# EAGLE board PiPSU (EAGLE 6.1)
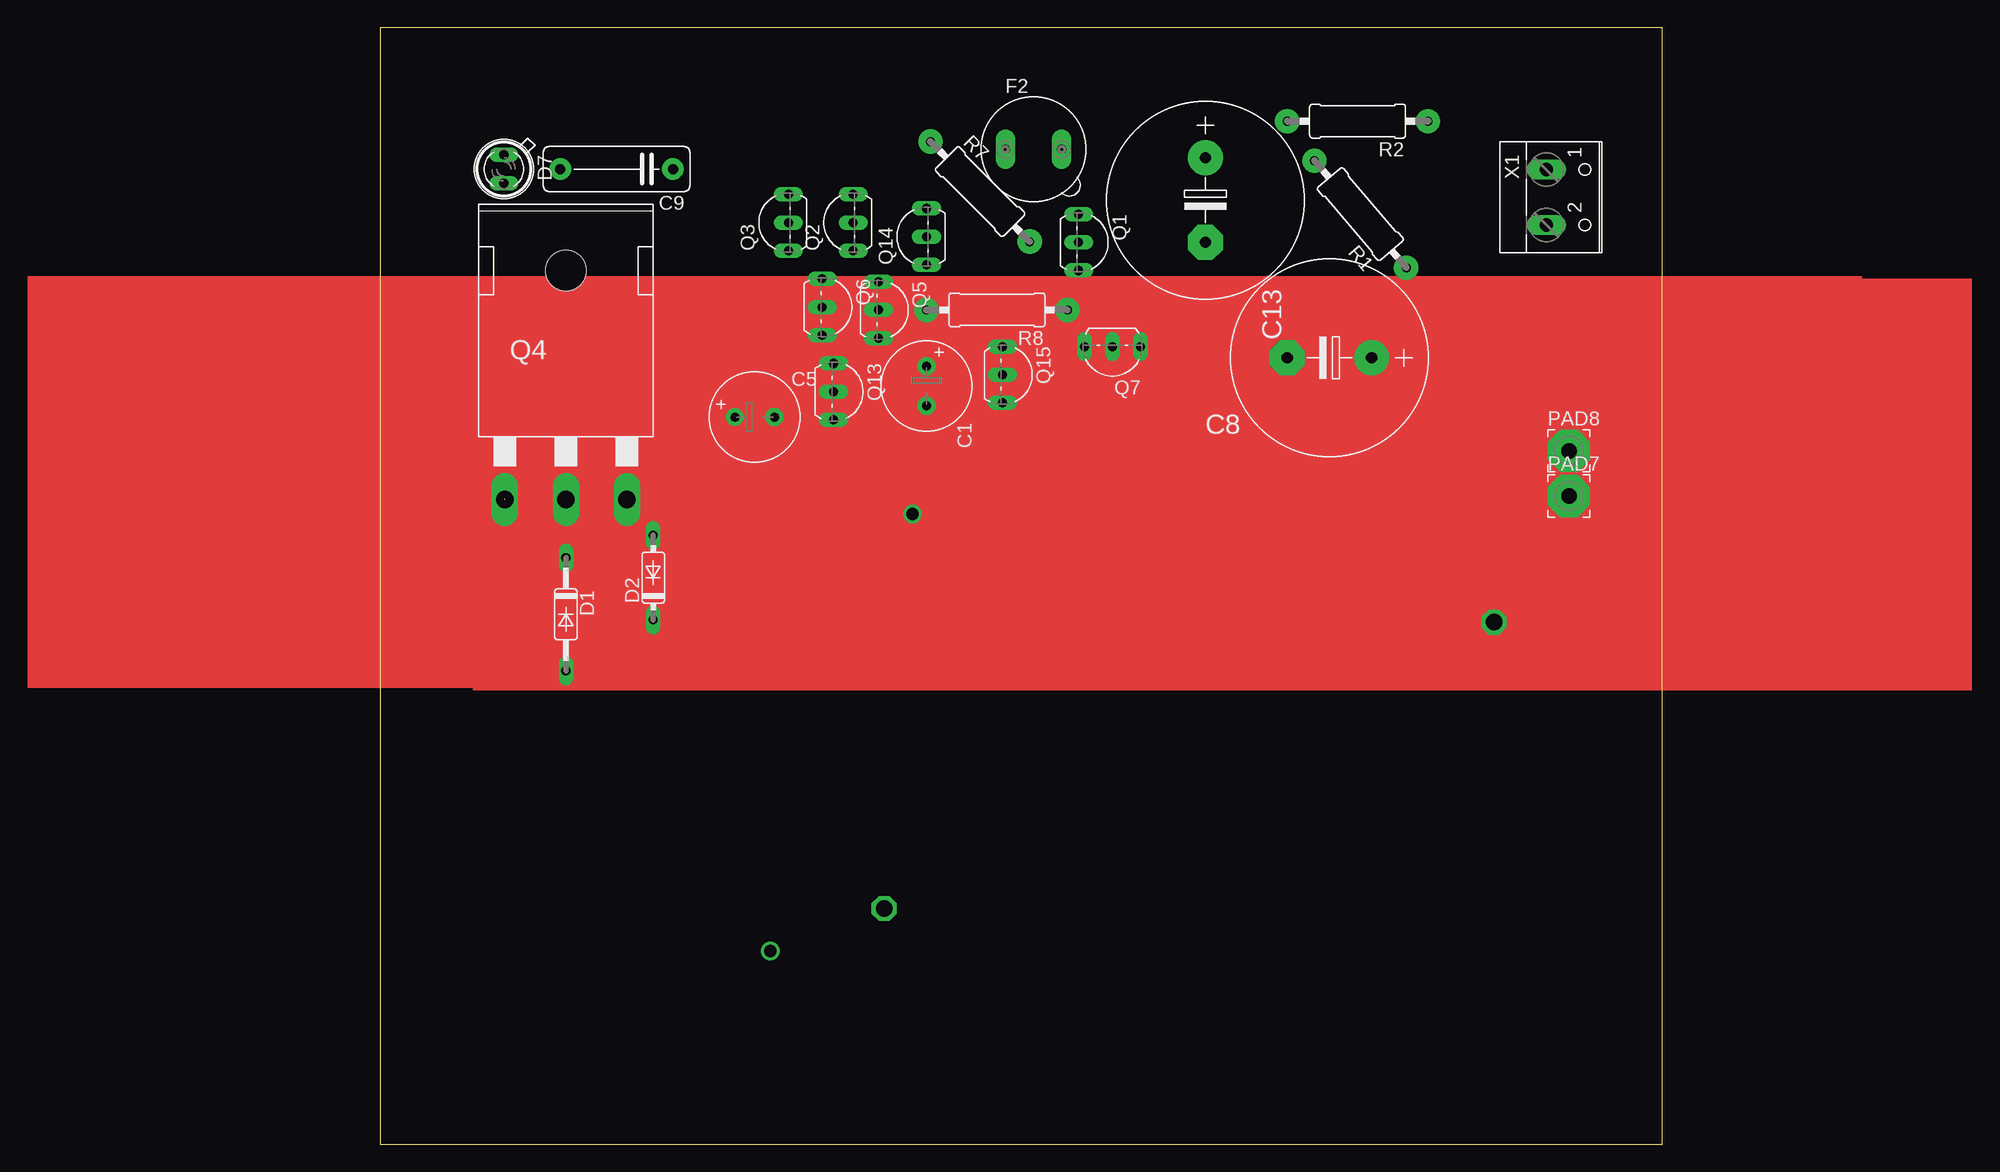
[diagram p0: board, top side]
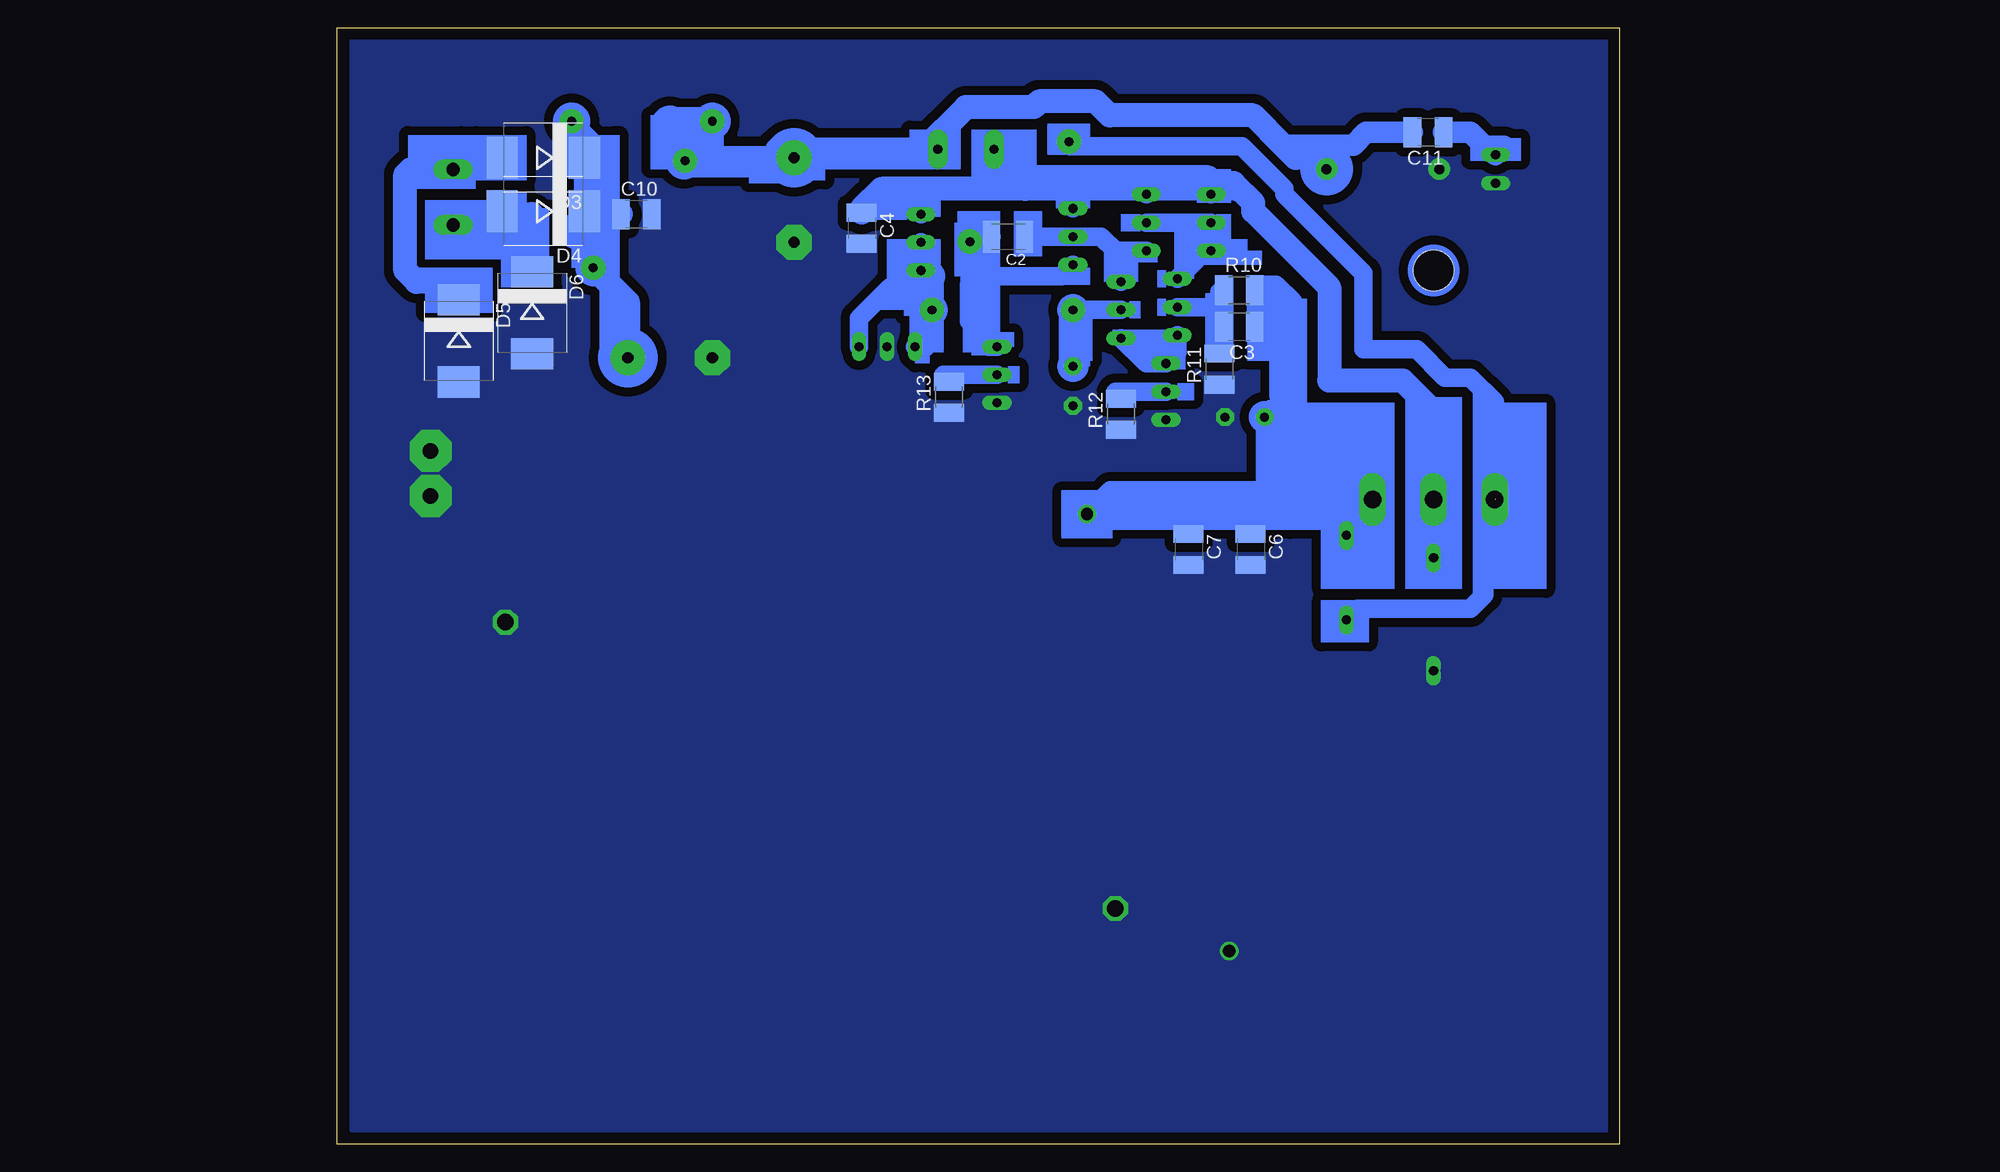
[diagram p1: board, bottom side, seen from below]

Size 115.58 x 100.61 mm. Coordinates in mm from the lower left corner, seen from the top.
Outline: 0,0 115.58,0 115.58,100.61 0,100.61 0,0
Copper layers (1*16): Top 0.035mm / dielectric 1.5mm / Bottom 0.035mm
Design rules: minimum track width 10mil, minimum drill 24mil, track to track 8mil, track to pad 8mil, pad to pad 8mil, via to via 8mil, smd to smd 8mil, copper to edge 40mil, drill to drill 8mil, minimum pad ring 10mil, minimum via ring 8mil, stop-mask expansion 4mil, vias tented up to drill 0mil, thermal gap 10mil

## Footprints (pad centres in the part's own frame; a part is rotated, then mirrored left to right if it is on the bottom)
E3,5-8 = drill 0.813 pad 1.6: + -1.778,0 | drill 0.813 pad 1.6 octagon: - 1.778,0
C1210K = smd 1.5 x 2.9: 1 -1.5,0; 2 1.5,0
C1210 = smd 1.6 x 2.7: 1 -1.4,0; 2 1.4,0
E7,5-18 = drill 1.016 pad 3.15: + -3.81,0 | drill 1.016 pad 3.15 octagon: - 3.81,0
C102-043X133 = drill 0.9 pad 1.93: 1 -5.08,0; 2 5.08,0
DO35-10 = drill 0.813 long: A 5.08,0; C -5.08,0
DO35-7 = drill 0.813 long: A 3.81,0; C -3.81,0
SMC = smd 2.8 x 3.8: A 3.7,0; C -3.7,0
SFH482 = drill 0.813 long: A -1.27,0; K 1.27,0
19560 = drill 0.813 pad 1.778 long: 1 -2.54,0; 2 2.54,0
3,81/1,4 = drill 1.397 pad 3.81 octagon: 1 0,0
TO92- = drill 0.813 long: 1 2.54,0; 2 0,0; 3 -2.54,0
TO92-EBC = drill 0.813 long: B 0,-1.27; C -2.54,-1.27; E 2.54,-1.27
TO-247AD-H = drill 1.6 long: D 0,-20.65; G -5.5,-20.65; S 5.5,-20.65 | hole 3.65: 0,0
0309/12 = drill 0.8 pad 2.184: 1 -6.35,0; 2 6.35,0
R1210 = smd 1.6 x 2.7: 1 -1.4,0; 2 1.4,0
W237-102 = drill 1.194 long: 1 -2.5,-1.27; 2 2.5,-1.27

## Placement (x,y rotation side)
C1  100uF  [E3,5-8]  49.25,68.32 270 top
C2  3n9  [C1210K]  55.09,81.78 180 bottom
C3  220pF  [C1210]  34.26,73.65 180 bottom
C4  100nF  [C1210]  68.3,82.54 270 bottom
C5  100uF  [E3,5-8]  33.75,65.53 0 top
C6  100nF  [C1210]  33.24,53.59 270 bottom
C7  100nF  [C1210]  38.83,53.59 270 bottom
C8  10000uF  [E7,5-18]  85.57,70.86 180 top
C9  100nF  [C102-043X133]  21.31,87.88 180 top
C10  100nF  [C1210]  88.62,83.81 0 bottom
C11  8K2  [C1210]  17.24,91.18 180 bottom
C13  2200uF  [E7,5-18]  74.39,85.08 270 top
D1  12TVS\  [DO35-10]  16.73,47.75 270 top
D2  18V  [DO35-7]  24.61,51.05 90 top
D3  3A  [SMC]  97,88.89 180 bottom
D4  3A  [SMC]  97,84.07 180 bottom
D5  3A  [SMC]  104.62,72.38 270 bottom
D6  3A  [SMC]  98.01,74.92 270 bottom
D7  SFH482  [SFH482]  11.15,87.88 270 top
F2  500mA  [19560]  58.9,89.66 0 top
PAD7  [3,81/1,4]  107.16,58.41 0 top
PAD8  [3,81/1,4]  107.16,62.48 0 top
Q1  3mA  [TO92-]  62.96,81.27 270 top
Q2  BC556B  [TO92-EBC]  41.37,83.05 90 top
Q3  BC556B  [TO92-EBC]  35.53,83.05 90 top
Q4  N-Ch  [TO-247AD-H]  16.73,78.73 0 top
Q5  BC546B  [TO92-EBC]  46.2,75.18 270 top
Q6  BC546B  [TO92-EBC]  41.12,75.43 270 top
Q7  TL431  [TO92-]  66.01,71.88 180 top
Q13  2mA  [TO92-]  40.86,67.81 270 top
Q14  BC556B  [TO92-EBC]  47.98,81.78 90 top
Q15  6mA  [TO92-]  56.1,69.34 270 top
R1  4R  [0309/12]  88.36,83.81 130.6 top
R2  4R  [0309/12]  88.11,92.2 180 top
R7  100  [0309/12]  54.07,85.85 314.8 top
R8  4K  [0309/12]  55.6,75.18 180 top
R10  10K  [R1210]  34.26,76.96 0 bottom
R11  10K  [R1210]  36.04,69.84 90 bottom
R12  249  [R1210]  44.93,65.78 90 bottom
R13  249  [R1210]  60.42,67.3 90 bottom
X1  [W237-102]  106.4,85.34 270 top

## Library data of the parts
C1-C11 C13 R1 R2 R7 R8 R10-R13 = resistor
D1-D6 = diode
D7 = led
F2 = fuse
PAD7 PAD8 = wirepad
Q1 Q7 Q13 Q15 = transistor-fet
Q2 Q3 Q14 = transistor-pnp
Q4 = transistor-power
Q5 Q6 = transistor-npn
X1 = con-wago-500; MPN: 237-102; OC_FARNELL: unknown; OC_NEWARK: 70K9898

## Nets
FGD: C1.- C4.2 C5.- C6.2 C7.2 C8.- C9.2 C10.2 C13.- D1.A D5.A D6.A D7.K PAD7.1 PAD8.1 Q7.2 Q13.1 Q15.1 R11.1 R12.1 R13.1
N$1: C9.1 C11.2 C13.+ F2.2 R1.2 R2.2
N$3: C8.+ C10.1 D3.C D4.C R1.1 R2.1
N$4: D3.A D5.C X1.1
N$5: D4.A D6.C X1.2
N$7: C3.1 C5.+ C6.1 C7.1 D2.A Q4.S R10.2
N$8: C4.1 D1.C F2.1 Q1.3 Q2.E Q3.E Q4.D Q14.E
N$9: C11.1 D7.A
N$11: D2.C Q4.G R7.1
N$12: C1.+ Q5.B R8.2
N$15: Q2.B Q3.B Q3.C Q6.C
N$16: Q5.E Q6.E Q13.3
N$17: C2.1 Q2.C Q5.C Q14.B
N$19: C2.2 Q14.C Q15.3 R7.2
N$20: C3.2 Q6.B R10.1 R11.2
N$22: Q1.1 Q1.2 Q7.1 Q7.3 R8.1
N$23: Q13.2 R12.2
N$24: Q15.2 R13.2

## Tracks (layer width: path | path; a pad name or v marks a point on that pad's centre or on a via)
FGD  (via drill 1.1, 1.5 pad 2.18)
  other vias: 45.43,21.23 100.41,47.04 35.17,17.41
  pour Bottom (isolate 0.813, no thermals): 114.27,1.26 114.27,99.56 0.48,99.56 0.73,1.26
N$1
  Bottom 1.93: C11.2 22.83,91.18 23.97,90.04 30.32,90.04 | R2.2 84.23,90.42 R1.2
  Bottom 2.184: 62.71,89.66 75.92,89.66 C13.+ 83.97,88.89 R1.2 | 62.71,89.66 F2.2 | C9.1 27.4,88.89 29.18,88.89 30.32,90.04 32.99,92.7 45.94,92.7 47.21,93.97 52.29,93.97 52.8,93.47 58.9,93.47 62.71,89.66
N$3
  Bottom 1.676: 93.3,83.09 D4.C | R2.1 91.66,89.4 91.66,87.37
  Bottom 2.184: C8.+ 89.38,75.88 R1.1 91.92,79.57 91.92,83.81 | 91.92,83.81 91.92,85.08 | 91.92,85.08 92.68,84.32 93.19,84.32 93.3,84.21 D4.C 91.66,85.7 91.66,87.37 91.66,88.39 92.17,88.89 D3.C | C10.1 91.92,83.81 | 91.92,85.08 91.92,85.34 91.66,85.59 91.41,85.59 91.92,85.08
N$4
  Bottom 2.184: D3.A 100.95,88.64 105.13,88.64 X1.1 108.98,87.84 109.44,87.37 109.44,78.73 108.43,77.72 106.25,77.72 D5.C
N$5
  Bottom 2.184: D6.C 98.01,83.81 100.44,83.81 D4.A 101.93,82.84 X1.2
N$7  (via drill 1.1)
  Bottom 1.676: 32.74,73.4 32.74,73.65 | 32.74,73.65 32.74,76.96 R10.2 | C3.1 32.74,73.65 | 32.74,73.65 32.23,74.16 30.45,74.16 | 29.43,74.67 29.69,74.42 | 29.43,75.94 30.96,77.46 32.23,77.46 29.94,75.18 29.94,74.42 | 29.43,63.49 28.42,64.51 23.34,64.51 22.23,63.41 Q4.S 22.23,57.23 D2.A | 29.43,63.49 29.43,66.29 30.45,67.3 30.45,66.03 29.94,65.53 | v47.99,56.79 45.87,58.92 38.83,58.92 | 29.43,63.49 29.43,59.68 30.2,58.92 32.48,58.92 | 29.43,63.49 29.69,63.75 29.69,65.78 29.94,65.53 | 29.94,65.53 C5.+ | C6.1 32.99,55.24 32.99,58.41 32.48,58.92 | C7.1 38.83,58.92 | 38.83,58.92 32.48,58.92
  Bottom 1.778: 30.45,74.16 30.2,74.42 29.94,74.42 29.69,74.42
  Bottom 2.184: 30.45,67.3 30.45,74.16
N$8
  Bottom 1.676: 36.8,86.61 36.8,86.1 Q3.E 37.05,85.85 37.05,87.12 | Q2.E 42.64,87.12 | Q14.E 49.25,87.12 | Q1.3 62.96,86.1 63.22,86.1 | Q4.D D1.C
  Bottom 1.93: 34.51,86.1 36.8,86.1
  Bottom 2.184: 36.8,86.61 37.31,87.12 | 37.31,87.12 42.64,87.12 49.25,87.12 53.56,87.12 | 37.05,87.12 37.31,87.12 | 53.56,87.12 53.56,86.1 63.22,86.1 66.52,86.1 68.3,84.32 C4.1 | 34.51,86.1 36.04,86.1 36.55,86.61 34.77,86.61 32.99,84.83 32.99,84.07 26.13,77.21 26.13,68.83 19.53,68.83 16.73,66.03 Q4.D | F2.1 56.36,86.86 | 56.36,86.86 56.36,86.61 | 53.56,87.12 53.82,86.86 56.36,86.86
N$9
  Bottom 1.93: C11.1 13.43,91.18 12.16,89.91 11.15,89.91 | 10.38,89.91 11.15,89.91 | 11.15,89.91 D7.A
N$11  (1 unrouted)
  Bottom 1.676: 49.53,90.16 49.75,90.16 49.5,89.91 34.01,89.91 30.2,86.1 30.2,85.59 23.08,78.48 23.08,71.62 18.26,71.62 15.72,69.08 13.43,69.08 11.23,66.88 Q4.G 7.59,55.46 | R7.1 49.53,90.16 | 49.53,90.16 49.5,90.16 | D2.C 23.59,48.25 13.43,48.25 12.16,49.52 12.16,53.33 11.15,54.35 11.15,57.91
  Bottom 1.93: 11.15,57.91 11.4,58.16 11.4,58.41 11.15,58.16
N$12
  Bottom 1.676: Q5.B 48.74,75.18 | C1.+ 48.74,70.61 48.74,75.18 | R8.2 48.74,75.18
N$15
  Bottom 1.676: 38.07,83.05 Q3.B Q3.C | 38.07,83.05 Q2.B | Q6.C 38.07,79.75 38.07,83.05
N$16
  Bottom 1.676: Q6.E 39.85,71.37 Q13.3 42.64,70.35 Q5.E
N$17
  Bottom 1.676: Q5.C 44.93,80.51 | 44.93,80.51 Q2.C | 44.93,80.51 45.44,80.51 46.71,81.78 Q14.B C2.1
N$19
  Bottom 1.676: Q14.C 50.26,78.23 56.36,78.23 | 56.36,78.23 57.63,79.5 57.63,81.02 | 57.63,81.02 57.63,82.29 57.12,81.78 C2.2 | R7.2 58.48,81.02 57.63,81.02 | Q15.3 56.87,71.88 57.63,72.64 57.63,73.15 58.64,74.16 58.64,77.46 57.88,78.23 56.36,78.23
N$20
  Bottom 0.813: 36.04,74.16 36.04,75.43 | R11.2 36.04,73.65 C3.2
  Bottom 1.676: R10.1 36.04,76.83 36.04,75.43 Q6.B | 36.04,74.16 35.78,73.91 C3.2
N$22
  Bottom 1.676: Q1.2 Q1.1 | Q1.1 62.96,77.97 61.95,77.97 | Q7.1 62.45,71.88 61.95,72.38 R8.1 | Q7.3 68.55,74.42 65.76,77.21 63.72,77.21 63.47,76.96 63.47,78.23 Q1.1
  Bottom 2.184: R8.1 61.95,77.97
N$23
  Bottom 1.676: Q13.2 45.18,67.81 | 45.44,67.81 45.18,67.81 | 45.18,67.81 44.93,67.56 R12.2
N$24
  Bottom 1.676: Q15.2 60.93,69.34 60.93,68.83 60.55,68.83 R13.2
(copper drawn outside any net)
  shapes: Bottom area x121, Bottom circle x16, Top area x4